# Altium PCB CT310高端控制盒IJ区按键电路V1.0.PcbDoc
Units mm, origin at the board's own origin, x right, y up, seen from the top; angles counter-clockwise.
Board outline 36.07 x 24.03 mm, 2 copper layers (Top Layer, Bottom Layer), stack 1.671 mm thick; 4 components, 5 nets, 23 pads, 0 vias.
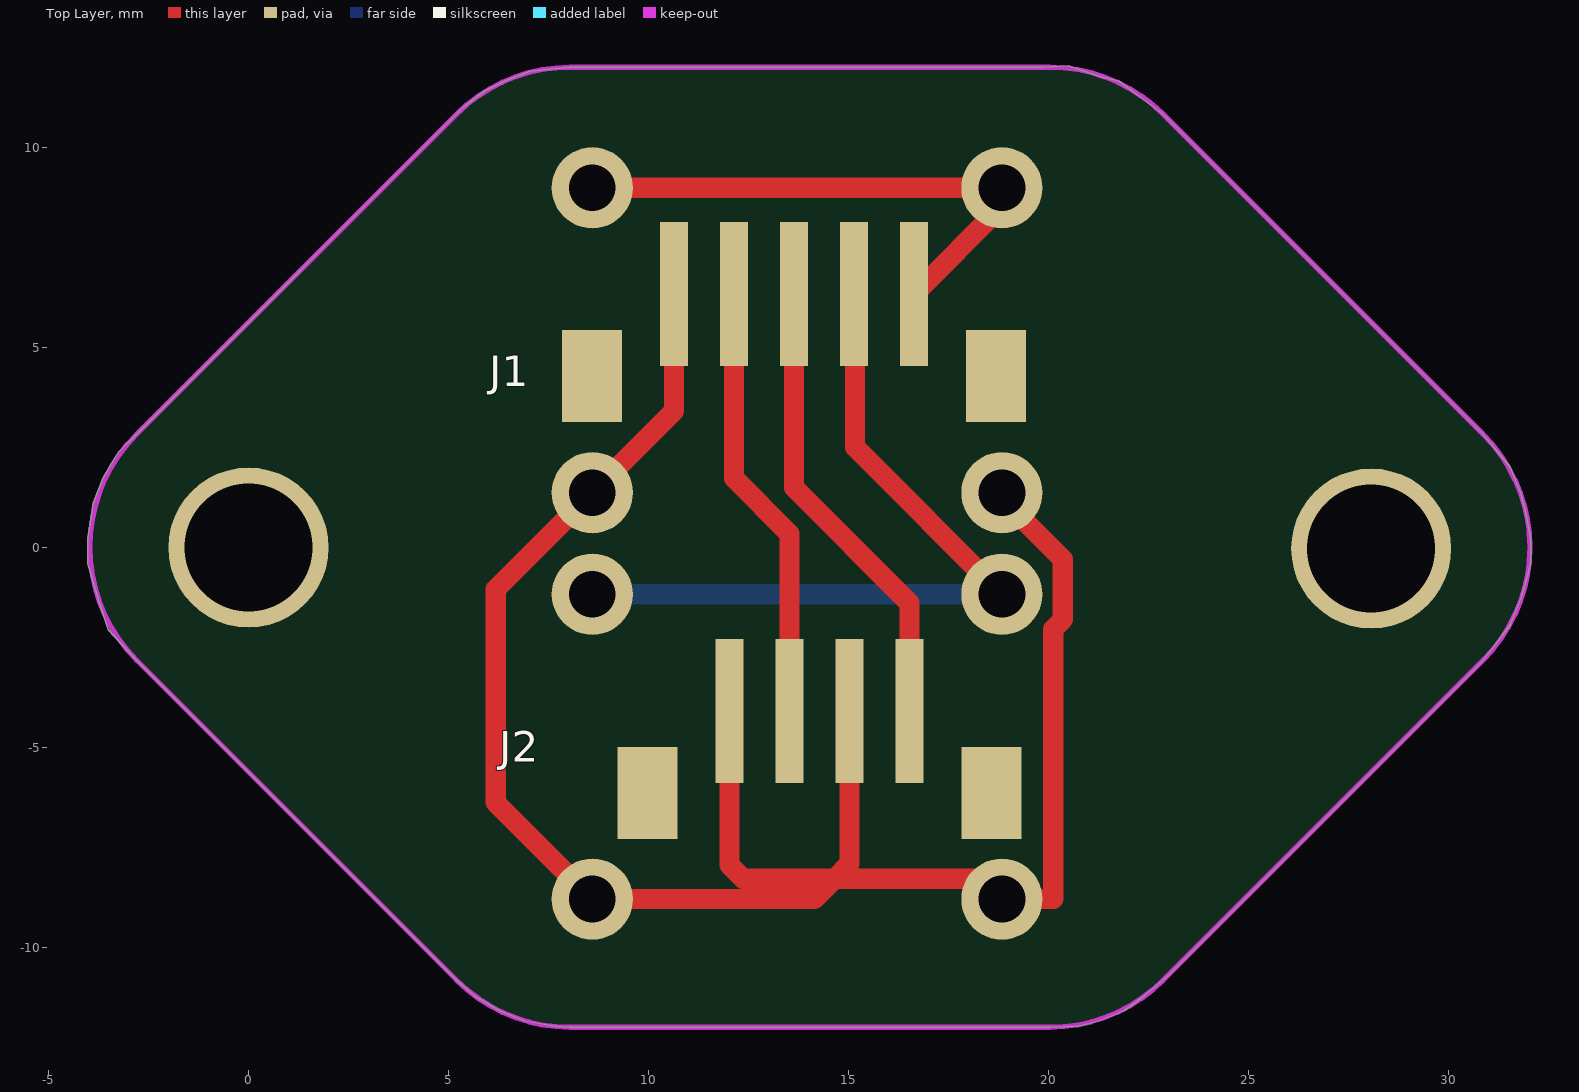
[diagram p0: Top Layer view]
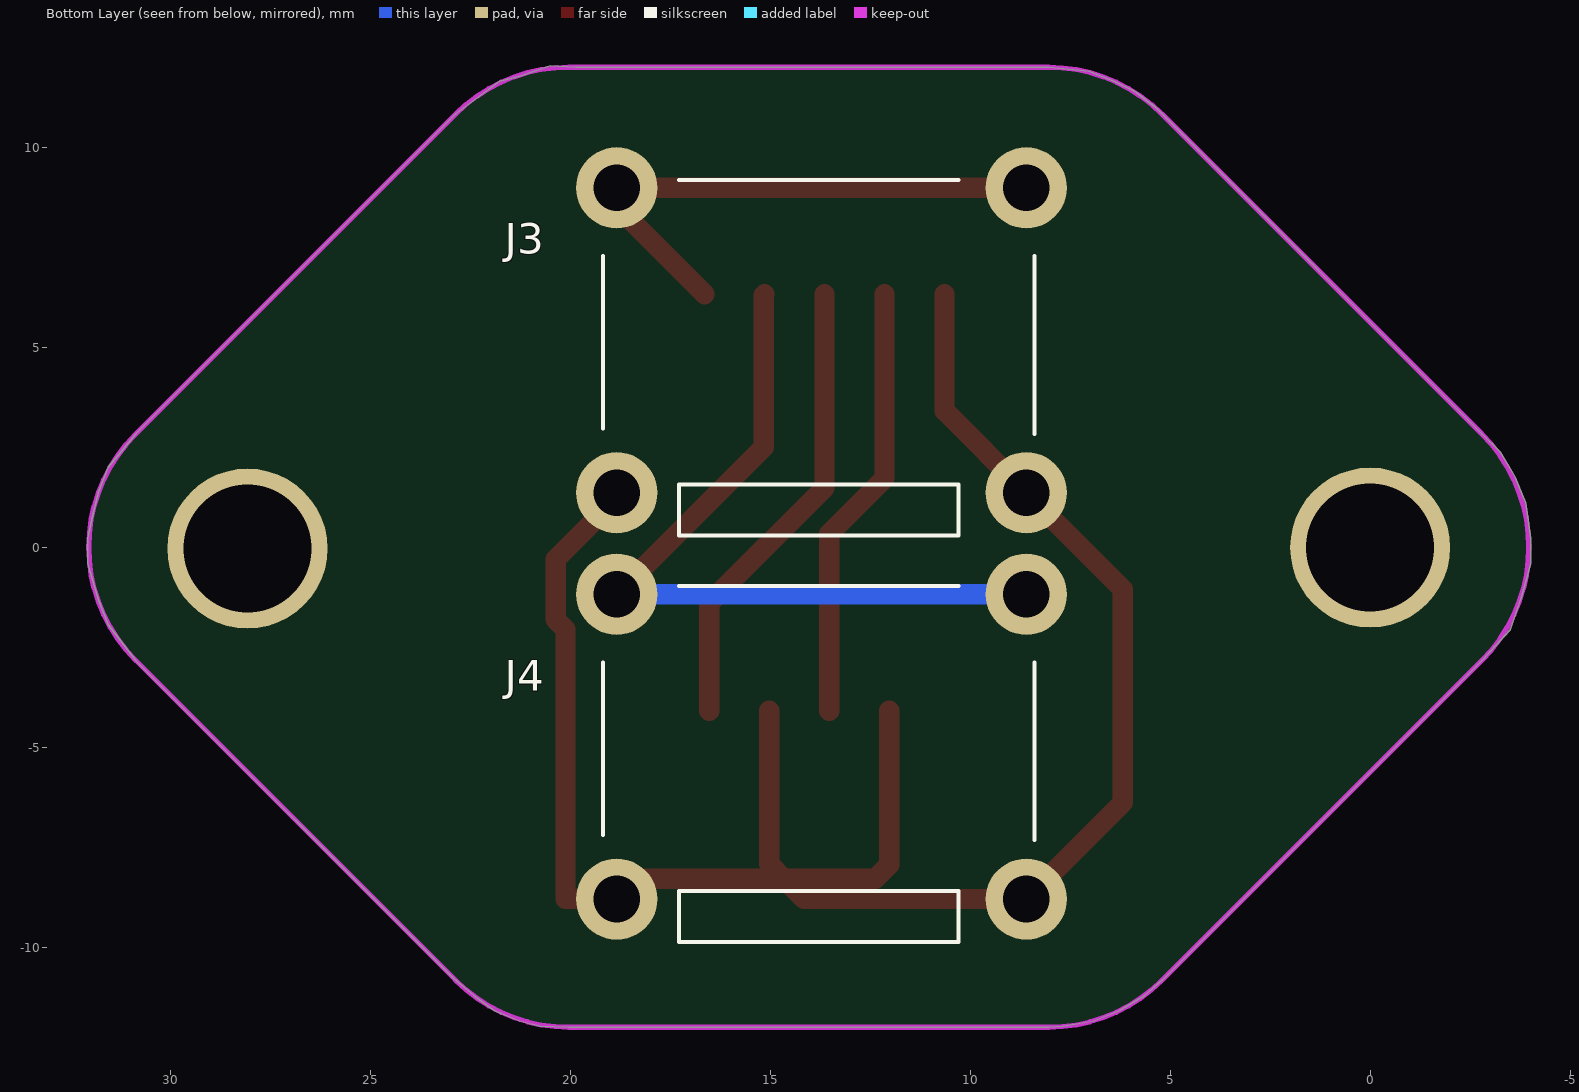
[diagram p1: Bottom Layer view, seen from below]

## Layer stack, top to bottom
Top Layer: signal copper 0.0356
Dielectric: core 1.6, FR-4, Dk 4.8
Bottom Layer: signal copper 0.0356

## Board outline
-2.794,-2.821 5.206,-10.821 5.639,-11.201 6.274,-11.582 6.909,-11.836 7.671,-11.963 8.035,-11.992 20.035,-11.992 20.752,-11.963 21.26,-11.836 21.895,-11.582 22.403,-11.201 22.911,-10.773 30.863,-2.821 31.547,-1.93 31.801,-1.295 32.055,-0.406 32.055,0.229 31.928,0.864 31.801,1.372 31.547,2.007 30.863,2.836 22.863,10.836 22.276,11.278 21.768,11.659 21.26,11.786 20.498,12.04 19.863,12.008 8.035,12.008 7.036,11.913 6.401,11.659 5.893,11.405 5.385,11.024 -2.794,2.836 -3.251,2.388 -3.632,1.753 -3.886,1.118 -4.013,0.229 -4.013,-0.406 -3.759,-1.295 -3.505,-2.057 -2.794,-2.821

## Design rules (kind name [scope] priority, off if disabled: settings)
Clearance [All] p1: gap=0.254
PolygonConnect [All] p1: connectstyle=Relief reliefconductorwidth=0.254 reliefentries=4 polygonreliefangle="90 Angle" airgapwidth=0.254
RoutingVias [All] p1: holewidth=0.711 width=1.27 viastyle="Through Hole" minholewidth=0.711 minwidth=1.27 maxholewidth=0.711 maxwidth=1.27
SilkToSolderMaskClearance SilkscreenOverComponentPads [IsPad] p1: minsilkscreentomaskgap=0.254 clearancetoexposedcopper=TRUE
SolderMaskExpansion [All] p1: expansion=0.102
Width [All] p1: maxlimit=2.54 minlimit=0.254 preferedwidth=0.254 minimp=50.000000 maximp=50.000000 favimp=50.000000
27 further rules are at their usual default settings.

## Components (designator, comment, footprint, x,y, rotation, side; value= is the part's Value field where it differs from the comment)
J1 "HEADER1X5" ZH1X5LT-1.5 13.64,5.309 r180 top
J2 "HEADER1X4" ZH1X4LT-1.5 14.275,-5.105 r180 top
J3 "HEADER1X2" SW-MEC 13.716,5.182 r180 bottom
J4 "HEADER1X2" SW-MEC 13.716,-4.978 r180 bottom

## Footprints (in the part's own frame and the unit in brackets; to place one, negate y for a bottom-side part, rotate by r counter-clockwise, add the part's x,y. Pads: shape width x height; smd on the part's side, far side on the other; paste and mask are expansions set on the pad)
SW-MEC [mil]
  round 80 hole 46: 1(-201.57,-150) 1(201.57,-150) 2(-201.57,150) 2(201.57,150)
  silkscreen extent -215,-192 210,158, body extent -211,-194 202,200, height 395
ZH1X4LT-1.5 [mm]
  rect 1.5x2.3 smd: 0(-4.3,1.025) 0(4.3,1.025)
  rect 0.7x3.6 smd: 1(-2.25,-1.025) 2(-0.75,-1.025) 3(0.75,-1.025) 4(2.25,-1.025)
  body extent -4.45,-2.69 4.55,2.51, height 5
ZH1X5LT-1.5 [mm]
  rect 1.5x2.3 smd: 0(-5.05,1.025) 0(5.05,1.025)
  rect 0.7x3.6 smd: 1(-3,-1.025) 2(-1.5,-1.025) 3(0,-1.025) 4(1.5,-1.025) 5(3,-1.025)
  body extent -5.25,-2.66 5.25,2.54, height 5

## Free pads (board coordinates)
  round 4 hole 3.2: 0(0,0) 0(28.067,-0.025)

## Nets (pads, with @x,y where several pads share a name; then routed paths per layer and width w, separated by ;. In a path a pad name is that pad's centre, name@x,y a point inside that pad or via, vN(x,y) a via of type N, cw(c..) or ccw(c..) an arc to the next point about the centre after c; other vN are vias at no path point)
KEY_IJ1: J1.1 J3.2 | length 13.8
  Top Layer w0.508: J3.2@8.596,8.992 18.836,8.992 18.836,8.53 J1.1
KEY_IJ2: J1.2 J4.2 | length 19.3
  Top Layer w0.508: J1.2 15.164,6.31 15.164,2.504 J4.2@18.836,-1.168
  Bottom Layer w0.508: J4.2@8.596,-1.168 J4.2@18.836,-1.168
KEY_M1: J1.3 J2.1 | length 11.6
  Top Layer w0.508: J1.3 13.64,1.499 16.525,-1.386 J2.1
KEY_M2: J1.4 J2.3 | length 11
  Top Layer w0.508: J1.4 12.14,1.729 13.525,0.344 J2.3
SGND: J1.5 J2.2 J2.4 J3.1 J4.1 | length 51.8
  Top Layer w0.508: J1.5 10.64,3.416 8.596,1.372 6.183,-1.041 6.183,-6.375 8.596,-8.788 14.148,-8.788 14.656,-8.28 ; J2.4 12.025,-7.935 12.37,-8.28 14.656,-8.28 ; J2.2 15.025,-7.911 14.656,-8.28 ; J3.1@18.836,1.372 18.836,1.23 20.36,-0.294 20.36,-1.799 20.117,-2.043 20.117,-8.788 18.836,-8.788 18.328,-8.28 14.656,-8.28
pads on no net: J1.0 J2.0

## Keep-outs
Keep-Out Layer:
  lines w0.127: -2.794,-2.821 cw(c0.035,0.008) -2.794,2.836 5.206,10.836 cw(c8.035,8.008) 8.035,12.008 20.035,12.008 cw(c20.035,8.008) 22.863,10.836 30.863,2.836 cw(c28.035,0.008) 30.863,-2.821 22.863,-10.821 cw(c20.035,-7.992) 20.035,-11.992 8.035,-11.992 cw(c8.035,-7.992) 5.206,-10.821 -2.794,-2.821

## Dimensions
-4.064,-0.127 to 30.863,2.836 on Keep-Out Layer
8.035,-11.992 to 8.035,12.008 on Keep-Out Layer